# EAGLE board Feather Fab (EAGLE 9.0.1)

Size 101.6 x 76.2 mm. Coordinates in mm from the lower left corner, seen from the top.
Copper layers (1*16): Top 0.035mm / dielectric 1.5mm / Bottom 0.035mm
Design rules "default": minimum track width 6mil, minimum drill 0.35mm, track to track 6mil, track to pad 6mil, pad to pad 6mil, via to via 6mil, smd to smd 6mil, copper to edge 40mil, drill to drill 6mil, minimum pad ring 10mil, minimum via ring 8mil, stop-mask expansion 4mil, vias tented up to drill 0mil, thermal gap 10mil

## Footprints (pad centres in the part's own frame; a part is rotated, then mirrored left to right if it is on the bottom)
FEATHER_FAB = drill 0.3 pad 1: P$1 3.5,3.5; P$2 98.1,72.7 | smd 1.016 x 2.032: P$3 41.91,49.93; P$4 44.45,49.93; P$5 46.99,49.93; P$6 49.53,49.93; P$7 52.07,49.93; P$8 54.61,49.93; P$9 57.15,49.93; P$10 59.69,49.93; P$11 62.23,49.93; P$12 64.77,49.93; P$13 67.31,49.93; P$14 69.85,49.93; P$15 31.75,26.289; P$16 34.29,26.289; P$17 36.83,26.289; P$18 39.37,26.289; P$19 41.91,26.289; P$20 44.45,26.289; P$21 46.99,26.289; P$22 49.53,26.289; P$23 52.07,26.289; P$24 54.61,26.289; P$25 57.15,26.289; P$26 59.69,26.289; P$27 62.23,26.289; P$28 64.77,26.289; P$29 67.31,26.289; P$30 69.85,26.289 | drill 1 pad 1.676: P$31 41.91,48.26; P$32 44.45,48.26; P$33 46.99,48.26; P$34 49.53,48.26; P$35 52.07,48.26; P$37 54.61,48.26; P$38 57.15,48.26; P$39 59.69,48.26; P$40 62.23,48.26; P$41 64.77,48.26; P$42 67.31,48.26; P$43 69.85,48.26; P$44 31.75,27.94; P$45 34.29,27.94; P$46 36.83,27.94; P$47 39.37,27.94; P$48 41.91,27.94; P$49 44.45,27.94; P$50 46.99,27.94; P$51 49.53,27.94; P$52 52.07,27.94; P$53 54.61,27.94; P$54 57.15,27.94; P$55 59.69,27.94; P$56 62.23,27.94; P$57 64.77,27.94; P$58 67.31,27.94; P$59 69.85,27.94

## Placement (x,y rotation side)
E$1  [FEATHER_FAB]  0,0 0 top

## Library data of the parts
E$1 = voltera_EAGLE_community_lib